# Altium PCB PCB图.PcbDoc
Units mm, origin at the board's own origin, x right, y up, seen from the top; angles counter-clockwise.
Board outline 152.4 x 101.6 mm, 2 copper layers (Top Layer, Bottom Layer); 11 components, 8 nets, 24 pads, 0 vias.
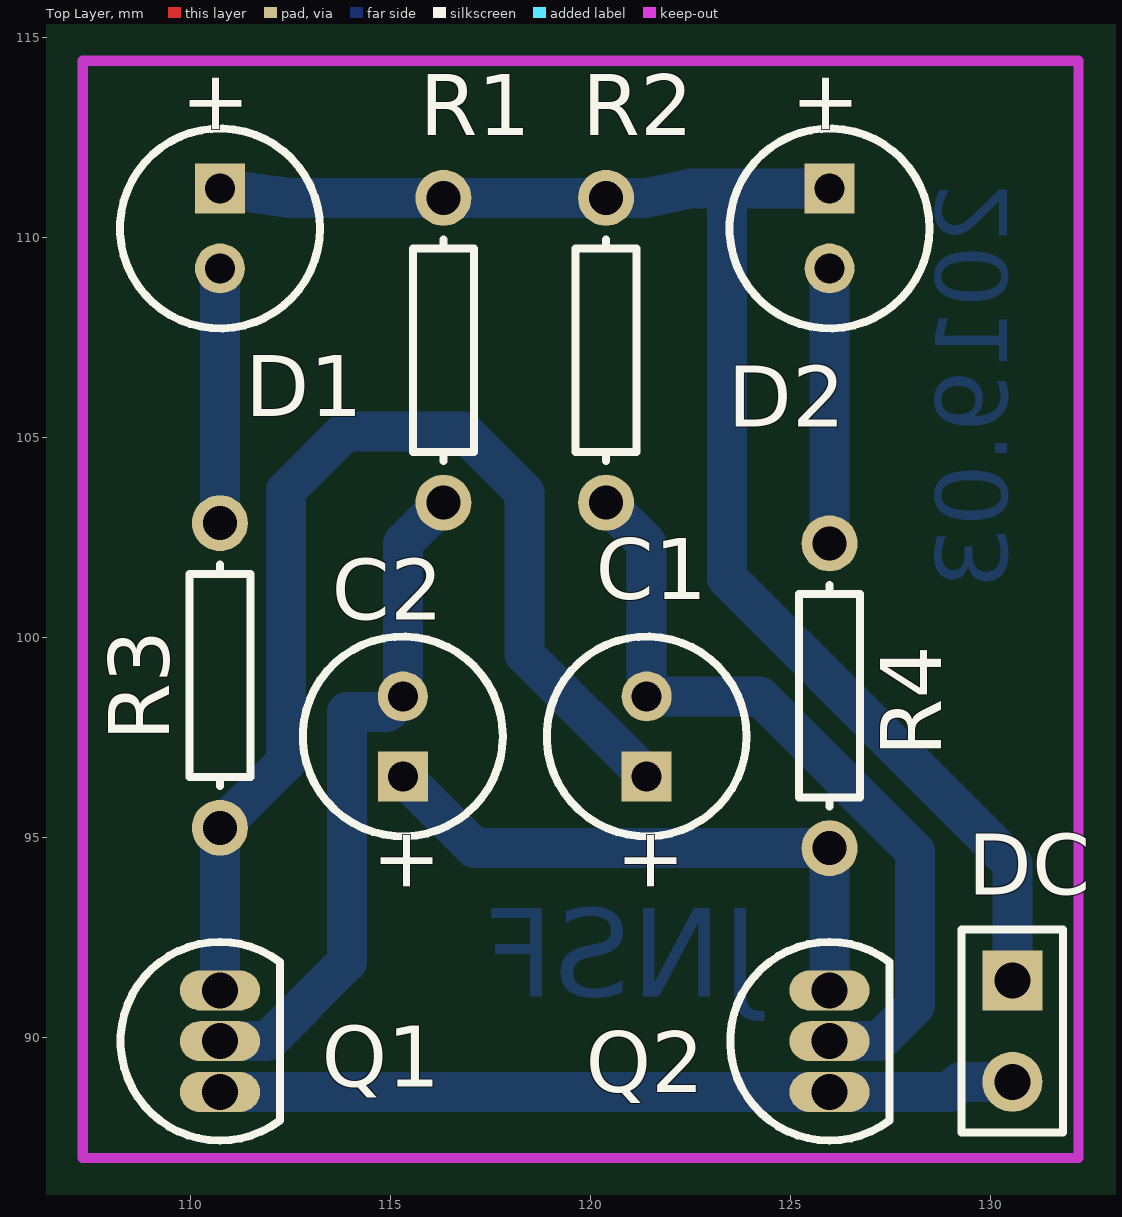
[diagram p0: Top Layer view]
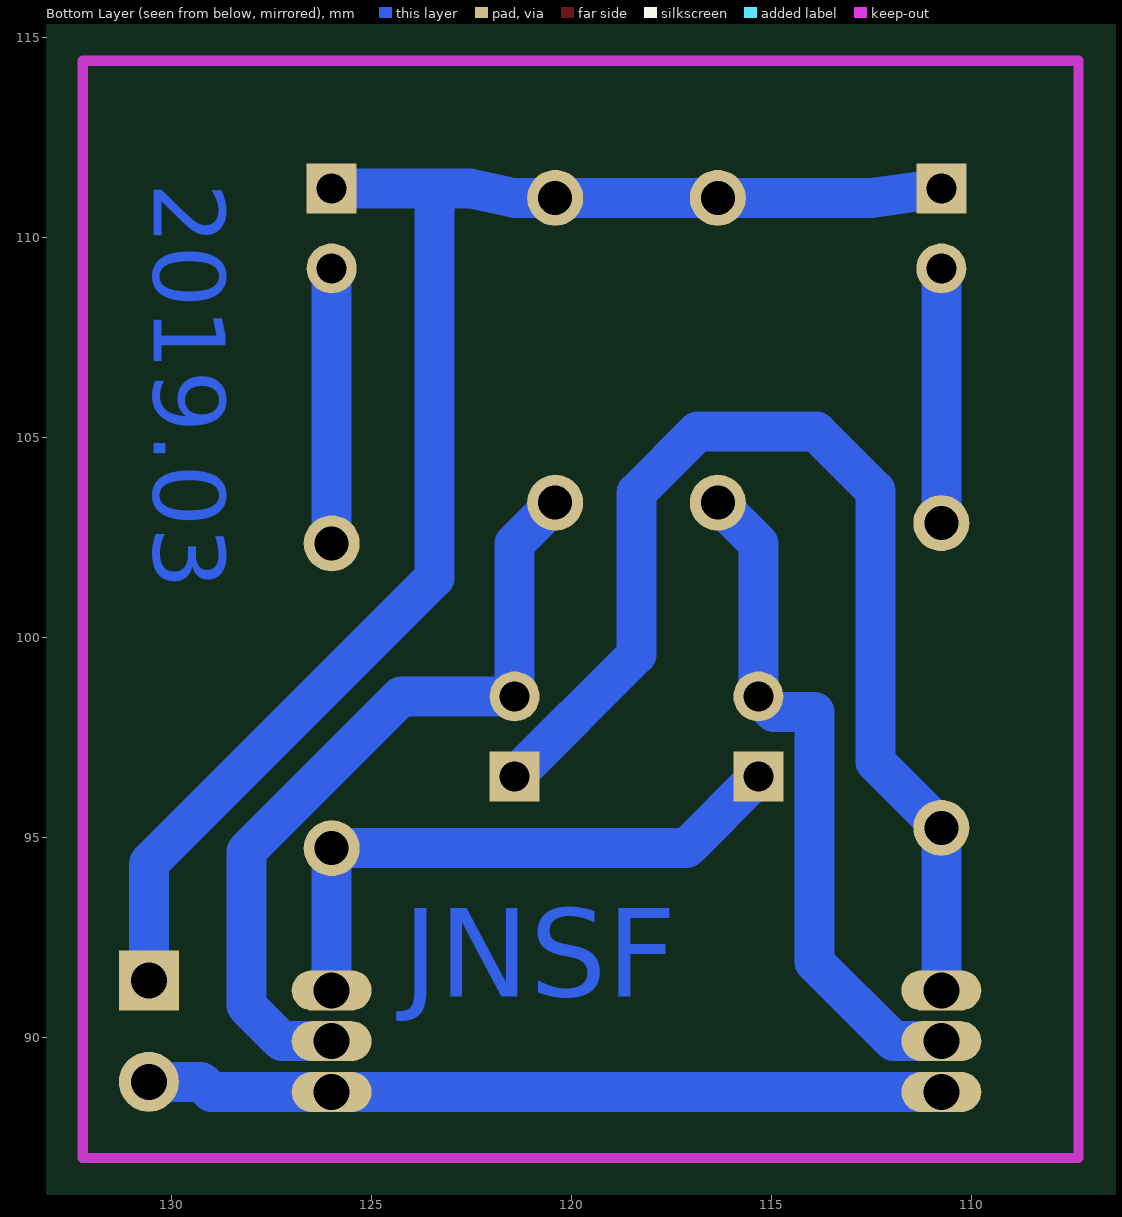
[diagram p1: Bottom Layer view, seen from below]

## Layer stack, top to bottom
Top Layer: signal copper 0.0356
Dielectric: dielectric 0.32, FR-4, Dk 4.8
Bottom Layer: signal copper 0.0356

## Board outline
25.4,25.4 177.8,25.4 177.8,127 25.4,127

## Design rules (kind name [scope] priority, off if disabled: settings)
Clearance [All] p1: gap=0.254
PolygonConnect [All] p1: connectstyle=Relief reliefconductorwidth=0.254 reliefentries=4 polygonreliefangle="90 Angle"
RoutingLayers [All] p1: top layer_v5=FALSE bottom layer_v5=TRUE
RoutingVias [All] p1: holewidth=0.711 width=1.27 viastyle="Through Hole" minholewidth=0.711 minwidth=1.27 maxholewidth=0.711 maxwidth=1.27
SilkscreenOverComponentPads [All] p1: minsilkscreentomaskgap=0.254
SolderMaskExpansion [All] p1: expansion=0.102
Width [All] p1: maxlimit=1 minlimit=0.4 preferedwidth=1
26 further rules are at their usual default settings.

## Components (designator, comment, footprint, x,y, rotation, side; value= is the part's Value field where it differs from the comment)
C1 "10U" CAPPR2-5x6.8 121.412,97.536 r90 top
C2 "10U" CAPPR2-5x6.8 115.316,97.536 r90 top
D1 "LED0" CAPPR2-5x6.8 110.744,110.236 r270 top
D2 "LED0" CAPPR2-5x6.8 125.984,110.236 r270 top
DC "3v" HDR1X2 130.556,91.44 r270 top
Q1 "9013" BCY-W3/E4 110.744,89.916 r0 top
Q2 "9013" BCY-W3/E4 125.984,89.916 r0 top
R1 "47K" AXIAL-0.3 116.332,107.188 r90 top
R2 "47K" AXIAL-0.3 120.396,107.188 r90 top
R3 "510" AXIAL-0.3 110.744,99.06 r90 top
R4 "510" AXIAL-0.3 125.984,98.552 r90 top

## Footprints (in the part's own frame and the unit in brackets; to place one, negate y for a bottom-side part, rotate by r counter-clockwise, add the part's x,y. Pads: shape width x height; smd on the part's side, far side on the other; paste and mask are expansions set on the pad)
AXIAL-0.3 [mm] "Axial Device, Thru-Hole; 2 Leads; 0.3 in Pin Spacing"
  round 1.4 hole 0.85: 1(-3.81,0) 2(3.81,0)
  silkscreen extent -2.77,-0.76 2.77,0.76
BCY-W3/E4 [mm] "TO, Flat Index; 3 In-Line, Axial Leads; Body Dia. 4.5mm; Leads 0.51 x 0.48 mm (max)"
  oval 2x1 hole 0.9: 1(0,-1.27) 2(0,0) 3(0,1.27)
  silkscreen extent -2.48,-2.48 1.5,2.48
CAPPR2-5x6.8 [mm] "Capacitor, Electrolytic, Radial; Body 5 x 6.8 mm (Dia.xH typ); Pin Spacing 2 mm (typ)"
  rect 1.25x1.25 hole 0.75: 1(-1,0)
  round 1.25 hole 0.75: 2(1,0)
  silkscreen extent -2.5,-2.5 2.5,2.5
HDR1X2 [mm] "Connector; Header; 2 Position"
  rect 1.5x1.5 hole 0.9: 1(0,0)
  round 1.5 hole 0.9: 2(2.54,0)
  silkscreen extent -1.27,-1.27 3.81,1.27

## Part data
C1 C2: library part "Cap Pol2", "Polarized Capacitor (Axial)"
D1 D2: "Typical INFRARED GaAs LED"
DC: library part "Header 2", "Header, 2-Pin"
Q1 Q2: library part 2N3904, "NPN General Purpose Amplifier"
R1 R2 R3 R4: library part Res1, "Resistor"

## Nets (pads, with @x,y where several pads share a name; then routed paths per layer and width w, separated by ;. In a path a pad name is that pad's centre, name@x,y a point inside that pad or via, vN(x,y) a via of type N, cw(c..) or ccw(c..) an arc to the next point about the centre after c; other vN are vias at no path point)
GND: DC.2 Q1.1 Q2.1 | length 19.9
  Bottom Layer w1: Q1.1 Q2.1 128.992,88.646 129.246,88.9 DC.2
NetC1_1: C1.1 Q1.3 R3.1 | length 28.7
  Bottom Layer w1: Q1.3 R3.1 112.395,96.901 112.395,103.683 113.868,105.156 116.84,105.156 118.364,103.632 118.364,99.584 C1.1
NetC1_2: C1.2 Q2.2 R2.1 | length 19.9
  Bottom Layer w1: R2.1 121.412,102.362 C1.2 124.246,98.536 128.118,94.665 128.118,90.805 127.229,89.916 Q2.2
NetC2_1: C2.1 Q2.3 R4.1 | length 15
  Bottom Layer w1: C2.1 117.11,94.742 R4.1 Q2.3
NetC2_2: C2.2 Q1.2 R1.1 | length 17.1
  Bottom Layer w1: Q1.2 111.938,89.916 113.919,91.897 113.919,98.146 114.926,98.146 C2.2 115.316,102.362 R1.1
NetD1_2: D1.2 R3.2 | length 6.4
  Bottom Layer w1: R3.2 D1.2
NetD2_2: D2.2 R4.2 | length 6.9
  Bottom Layer w1: R4.2 D2.2
VCC: D1.1 D2.1 DC.1 R1.2 R2.2 | length 37.8
  Bottom Layer w1: D1.1 112.487,110.998 115.316,110.998 121.412,110.998 122.514,111.236 D2.1 ; 123.419,110.998 123.419,101.498 130.556,94.361 DC.1

## Keep-outs
Keep-Out Layer:
  lines w0.254: 107.315,86.995 132.207,86.995 132.207,114.427 107.315,114.427 107.315,86.995

## Other copper
Bottom Layer:
  text "2019.03" at 130.429,111.379 h1.8 r90
  text "JNSF" at 124.206,90.297 h3.8

## Text inside footprints (layer, text, board x,y; h text height)
C1: Top Overlay "+" at 122.162,93.561 h1.5 r90
C2: Top Overlay "+" at 116.066,93.561 h1.5 r90
D1: Top Overlay "+" at 109.994,114.211 h1.5 r270
D2: Top Overlay "+" at 125.234,114.211 h1.5 r270